# Altium PCB AHD PCB R2.4.PcbDoc (part 2 of 2)
Units mil, origin at the board's own origin, x right, y up, seen from the top; angles counter-clockwise.
Board outline 4500 x 2100 mil, 4 copper layers (Top Layer Signals, Ground Plane, Power Plane, Bottom Layer Signals); 162 components, 142 nets, 631 pads, 242 vias.
Unrouted connection lines stored in the file: 1.
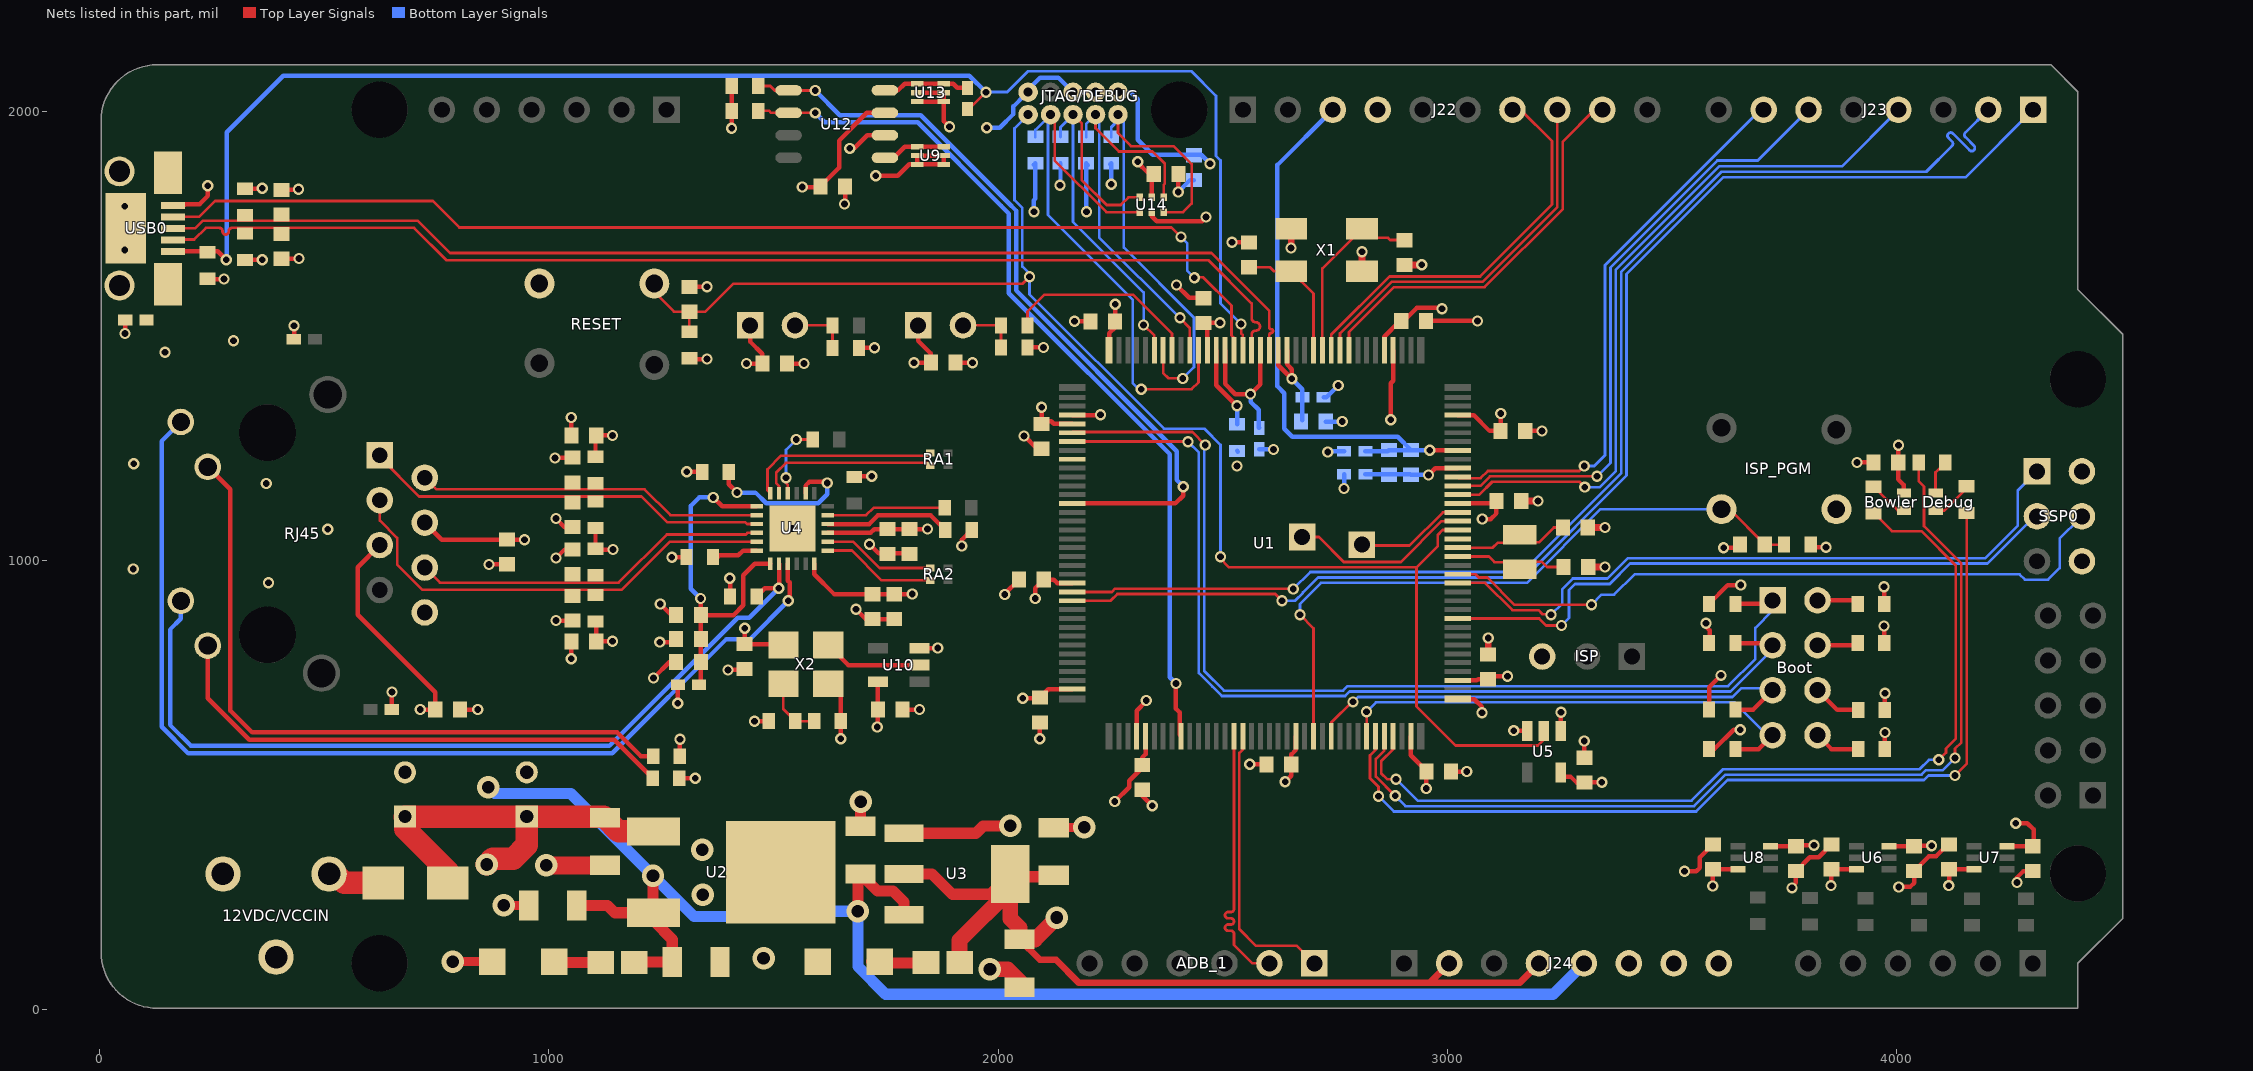
[diagram p4: the nets of this part, all layers, seen from the top]

## Via types
v1: diameter 25, hole 15, Top Layer Signals to Bottom Layer Signals, 226 vias
v2: diameter 50, hole 28, Top Layer Signals to Bottom Layer Signals, 15 vias
v3: diameter 25, hole 15, Top Layer Signals to Bottom Layer Signals, tented bottom, 1 vias

## Nets (pads, with @x,y where several pads share a name; then routed paths per layer and width w, separated by ;. In a path a pad name is that pad's centre, name@x,y a point inside that pad or via, vN(x,y) a via of type N, cw(c..) or ccw(c..) an arc to the next point about the centre after c; other vN are vias at no path point) (continued)
GND: 12VDC/VCCIN.2 12VDC/VCCIN.3 C1.1 C2.1 C3.1 C5.1 C6.1 C7.1 C8.1 C9.1 C10.1 C11.1 C12.1 C13.1 C19.1 C21.2 C22.2 C23.1 C24.1 C25.1 C26.1 C27.1 C28.1 C29.1 C30.1 C31.1 C34.1 C35.1 C36.2 C37.2 C38.2 C39.1 C40.2 C41.1 C42.2 C43.2 C44.2 C45.2 C48.1 C49.2 C52.2 C53.2 C54.1 C55.2 C56.2 C57.2 C58.1 C59.2 C60.2 C61.1 C63.2 C64.1 C65.1 C66.2 C67.2 C68.2 C69.2 C70.2 C71.2 C72.2 C73.2 D1.2 D2.2 FB3.1 FB5.1 FB6.2 FB8.1 FB9.1 ISP.3 ISP_PGM.4 J22.4 J24.6 J24.7 JTAG/DEBUG.3 JTAG/DEBUG.5 JTAG/DEBUG.9 R9.1 R10.1 R11.1 R15.1 R27.1 R28.1 R29.1 R30.1 R31.1 R35.1 R40.1 R41.1 R56.1 R57.1 R64.1 RESET.4 RJ45.8 SSP0.6 U1.4 U1.40 U1.76 U1.109 U2.2 U3.1 U4.25 U5.1 U5.3 U10.3 U12.6 U14.2 USB0.5 USB0.GND X1.2 X1.4 X2.2 | length 5226.7
  Top Layer Signals w6: R64.1@240,1626.47 R64.1@240.47,1626 ; FB8.1@432.38,1492 FB8.1@433,1492.62 ; v1(2521,1708) v1@2521.44,1707.56 ; C37.2@2604.44,543 C37.2@2607.44,546 ; C54.1@3644.44,1028 C54.1@3651.44,1035
  Top Layer Signals w10: v1(57,1505) 57.38,1505.38 FB5.1@57.38,1535 ; USB0.5@188.4,1790.18 191.22,1793 223,1793 241,1811 v1(241,1834) ; R64.1@240.47,1626 v1(277,1626) ; R40.1@324,1669.47 v1@361.53,1669.47 ; R41.1@324,1827.53 v1@361.53,1827.53 ; C63.2@405,1671.44 443.44,1671.44 v1(444,1672) ; C66.2@405,1824.56 441.56,1824.56 v1(443,1826) ; FB8.1@433,1492.62 v1(433,1522) ; FB9.1@650.62,668 651,668.38 v1(651,707) ; C28.1@802.56,668 v1(842,668) ; v1(867,991) 906.56,991 C29.1@907,991.44 ; C8.1@962.85,216.85 C8.1@962.85,232 ; v1(1014,1228) 1052.44,1228 C25.1@1053,1228.56 ; v1(1016,866) 1016.09,865.91 C26.1@1053,865.91 ; v1(1016,1005) 1035.03,1024.03 C27.1@1053,1024.03 ; v1(1016,1093) 1035.09,1073.91 C24.1@1053,1073.91 ; v1(1050,781) 1050,819.03 C31.1@1050.44,819.47 ; v1(1050,1318) 1050,1277.91 C30.1@1050.44,1277.47 ; v1(1233,738) 1269,774 C21.2@1283.44,774 ; v1(1247,818) 1276.44,818 C9.1@1283.44,825 ; v1(1248,903) 1273,878 C10.1@1283.44,878 ; v1(1274,1007) R27.1@1306.47,1007 ; R11.1@1291.53,564 1292,564.47 v1(1292,602) ; C1.1@1313,1608.56 1351.56,1608.56 v1(1352,1609) ; v1(1399,756) 1433.56,756 C2.1@1436,758.44 ; v1(1407,1962) 1407,1999.53 R9.1@1407.47,2000 R10.1@1407.47,2056 ; C65.1@1530.56,1438 v1(1568,1438) ; X2.2@1622,725 1649.53,697.47 R15.1@1649.53,642 1649.53,603.47 v1(1650,603) ; v1(1658,1793) 1659.56,1794.56 C59.2@1659.56,1832 ; v1(1670,1917) 1680,1917 1709,1946 U12.6@1748.28,1946 ; v1(1684,891) 1705.56,869.44 C12.1@1720.28,869.44 C23.1@1769,869.44 ; R56.1@1690.53,1473 v1(1725,1473) ; v1(1714,1036) 1734.56,1015.44 C22.2@1803,1015.44 ; C3.1@1787.56,668 v1(1825,668) ; U10.3@1825.26,804.4 1865.4,804.4 v1(1866,805) ; C64.1@1905.56,1440 v1(1943,1440) ; v1(2015,924) 2015,925.56 C40.2@2046.44,957 ; v1(2058,1277) 2086.56,1248.44 C43.2@2097,1248.44 ; R57.1@2066.53,1474 v1(2101,1474) ; v1(2093,603) C38.2@2093,639.44 ; U1.40@2164.87,1323.43 2227.43,1323.43 v1(2228,1324) ; v1(2170,1532) C41.1@2205.44,1532 ; v2@2191.15,405.15 v2(2192,406) ; U1.76@2308.57,608.87 2308.57,665.57 v1@2330,687 ; C44.2@2321,489.44 2321,476 v1(2343,454) ; U14.2@2341.97,1775.03 2341.97,1766.03 2353,1755 2454,1755 v1(2463,1764) ; v1(2397,1613) 2425.44,1584.56 C39.1@2467,1584.56 ; v1(2401,1820) 2401,1859.44 C58.1@2401.56,1860 ; v1@2521.44,1707.56 C49.2@2559,1707.56 ; v1(2560,546) C37.2@2597.44,546 ; X1.4@2810,1643.51 X1.4@2818.51,1643.51 ; v1(2874,1313) 2874,1394.23 2879.43,1399.67 U1.4@2879.43,1467.13 ; C57.2@2952.56,1533 v1(3067,1533) ; C55.2@3008.56,530 v1(3043,530) ; U1.109@3023.13,691.15 3059.85,691.15 3077,674 v1(3077,661) ; v1(3148,621) 3178.42,621 U5.3@3178.6,621.18 ; C36.2@3173.56,1288 v1(3211,1288) ; v1(3253,662) 3253,621.58 U5.1@3253.4,621.18 ; C60.2@3305,560.56 v1(3305,598) ; v1(3528,308) 3554.28,308 3562.28,316 3562.28,338.84 C71.2@3591,367.56 ; v1(3615,1028) C54.1@3644.44,1028 ; v1(3767,271) 3767,273 3776,282 C72.2@3776,308.44 3806.56,339 3826.44,339 C69.2@3855,367.56 ; v1(3912,1218) C61.1@3948.44,1218 ; v1(3972,854) 3972,816.53 R30.1@3972.53,816 R30.1@3972.53,803.47 ; v1(3972,941) 3972,903.53 R31.1@3972.53,903 ; R28.1@3972.53,581 R28.1@3973.53,580 3974,580.47 v1(3974,617) ; R29.1@3973.53,679.53 R29.1@3973.53,667 3974,667.47 v1(3974,704) ; v1(4005,273) 4030,273 4039,282 C70.2@4039,308.44 4072.06,341.5 4087.73,341.5 4113.79,367.56 C68.2@4117,367.56 ; v1(4268,283) 4268,294 4282.44,308.44 C67.2@4303,308.44
  Top Layer Signals w15: v1(2652,1695) 2652.52,1695.52 X1.2@2652.52,1738 ; X1.4@2810,1643.51 v1(2810,1687) ; C48.1@2905,1657.44 2942.44,1657.44 v1(2943,1658) ; C56.2@3091,790.56 v1(3091,827) ; C42.2@3164.56,1132 v1(3202,1132) ; C34.1@3312.56,1073 v1(3351,1073) ; C35.1@3313.56,985 v1(3351,985)
  Top Layer Signals w20: v2(786,107) D1.2@874.1,107 ; v2(900,232) C8.1@955.85,232 ; C13.1@2124,405.15 v2@2191.15,405.15
  Top Layer Signals w25: C6.1@1694,408.15 v2(1694,463) ; U3.1@1790.89,392.55 1950.55,392.55 1967,409 v2(2027,409)
  Top Layer Signals w35: v2(1982,90) 2021,90 2048,63 C7.1@2048,49
  Top Layer Signals w40: v2@994.15,320.85 C5.1@1125,320.85
  Bottom Layer Signals w6: v1(2770,1160) v1@2770.38,1160.38
  Bottom Layer Signals w10: v1(1975,1963) 2004,1963 2034.35,1993.35 2034.35,2010.35 2058.5,2034.5 2067,2026 JTAG/DEBUG.9@2067,2042 2067,2048 2093.65,2074.65 2134.35,2074.65 JTAG/DEBUG.5@2167,2042 JTAG/DEBUG.3@2217,2042 ; v1(2401,1820) 2427.44,1846.44 C73.2@2436,1846.44 ; R35.1@2532,1243.47 R35.1@2533.47,1242 ; FB6.2@2581,1247.38 2612.62,1247.38 v1(2613,1247) ; C45.2@2729.56,1309 v1(2766,1309) ; v1@2770.38,1160.38 FB3.1@2770.38,1192
  other v1: 2330,688 376,950 75,981 508,1069 1542,1071 371,1171 2532,1210 76,1215 146,1463 298,1489 362,1669 56,1691 56,1788 362,1828
  other v2: 1478,114 1343,256 994,321 1342,356
GPIO1_6_TXD: J23.2 U1.60 | length 2862
  Top Layer Signals w6: U1.60@2164.87,929.73 2253.26,929.73 2260.53,937 2656,937 v1(2657,936)
  Bottom Layer Signals w6: v1(2657,936) 2695,974 3167.38,974 3387,1193.62 3387,1641.97 3610.03,1865 4066,1865 4123.5,1922.5 ccw(c4118.59,1927.41) 4123.5,1932.31 4115.46,1940.35 cw(c4120.37,1945.25) 4115.46,1950.16 cw(c4120.37,1945.25) 4125.27,1950.16 4162.37,1913.06 ccw(c4167.28,1917.96) 4172.18,1913.06 ccw(c4167.28,1917.96) 4172.18,1922.87 4152.93,1942.12 cw(c4157.84,1947.03) 4152.93,1951.93 J23.2@4204,2003
GPIO1_7_RXD: J23.1 U1.61 | length 2867.7
  Top Layer Signals w6: U1.61@2164.87,910.05 2250.55,910.05 2265.5,925 2617,925 v1(2632,910)
  Bottom Layer Signals w6: v1(2632,910) v1(2632,910) 2661.45,910.05 2678.5,927.09 2678.5,928.5 2712,962 3172.35,962 3399,1188.65 3399,1637 3615,1853 4154,1853 J23.1@4304,2003
GPIO08_NET: Boot.1 R47.2 U1.42 | length 2318.5
  Top Layer Signals w6: U1.42@2164.87,1284.06 2166.3,1285.5 2432.5,1285.5 v1(2461,1257) ; Boot.1@3716,903 Boot.1@3724,911
  Top Layer Signals w10: R47.2@3641.53,903 Boot.1@3716,903
  Bottom Layer Signals w6: v1(2461,1257) 2459,1255 2459,754 2503,710 2767.62,710 2777.62,720 3625,720 3685.47,780.47 3685.47,849.53 3724,888.06 Boot.1@3724,911
GPIO09_NET: Boot.3 R46.2 U1.43 | length 2219.5
  Top Layer Signals w6: U1.43@2163.69,1263.2 U1.43@2164.87,1264.38 v1@2423,1264.38 ; Boot.3@3719,816 Boot.3@3724,811
  Top Layer Signals w10: R46.2@3641.53,816 Boot.3@3719,816
  Bottom Layer Signals w6: v1(2423,1264) 2447,1240 2447,749 2477,719 ; 2477.03,719 2498.03,698 2772.59,698 2782.59,708 3629.97,708 3724,802.03 Boot.3@3724,811
GPIO57_NET: Boot.5 R33.2 U1.98 | length 1145.7
  Top Layer Signals w6: U1.98@2741.64,608.87 2741.64,638.64 2788,685 v1(2790,685)
  Top Layer Signals w10: R33.2@3641.53,668 3681,668 Boot.5@3724,711
  Bottom Layer Signals w6: v1(2790,685) 2801,696 3634.94,696 3653.94,715 3720,715 Boot.5@3724,711
GPIO110_NET: Boot.7 R32.2 U1.102 | length 1092.5
  Top Layer Signals w6: v1(2820,663) 2820.38,662.62 U1.102@2820.38,608.87
  Top Layer Signals w10: R32.2@3641.53,580 3693,580 Boot.7@3724,611
  Bottom Layer Signals w6: v1(2820,663) 2841,684 3639,684 3712,611 Boot.7@3724,611
I2C1_SCL: ADB_1.2 U1.87 | length 616.3
  Top Layer Signals w6: U1.87@2525.1,608.87 2525.1,224.13 cw(c2518.17,224.13) 2518.17,217.19 2512.22,217.19 ccw(c2512.22,210.25) 2505.28,210.25 ccw(c2512.22,210.25) 2512.22,203.32 2518.17,203.31 cw(c2518.17,196.38) 2525.1,196.38 cw(c2518.17,196.38) 2518.17,189.44 2512.22,189.44 ccw(c2512.22,182.5) 2505.28,182.5 ccw(c2512.22,182.5) 2512.22,175.57 2518.17,175.57 cw(c2518.17,168.63) 2525.1,168.63 2525.1,143.9 2566,103 ADB_1.2@2604,103
I2C1_SDA: ADB_1.1 U1.88 | length 631.5
  Top Layer Signals w6: U1.88@2544.79,608.87 2544.79,578.79 2537.1,571.1 2537.1,178.9 2574,142 2665,142 ADB_1.1@2704,103
ISP_RESET: C54.2 ISP_PGM.3 R52.1 U1.96 | length 1505.4
  Top Layer Signals w6: v1(2672,879) 2702.27,848.73 U1.96@2702.27,608.87 U1.96@2703,608.13 ; ISP_PGM.3@3610.09,1113.83 3627.72,1113.83 C54.2@3706.56,1035 R52.1@3749.47,1035
  Bottom Layer Signals w6: v1(2672,879) 2672,903 2719,950 3177.32,950 3341.15,1113.83 ISP_PGM.3@3610.09,1113.83 ISP_PGM.3@3609.93,1114
LED1: RJ45.9 U4.3 | length 2340.4
  Top Layer Signals w10: U4.3@1532.16,992.26 1532.16,954.84 1536,951 1536,913 v1(1533,910)
  Bottom Layer Signals w10: RJ45.9@181.09,1308.02 138.56,1265.49 138.56,629.44 197,571 1141.63,571 1394.63,824 1447,824 v1(1533,910)
LED2: R26.2 RJ45.11 U4.2 | length 1921.7
  Top Layer Signals w10: R26.2@1462.53,920 1480.53,938 v1(1512,938) ; v1@1509,935 v1(1512,938) ; U4.2@1512.47,992.26 1512.47,938.47 v1(1512,938)
  Bottom Layer Signals w10: RJ45.11@181.09,909.98 181.09,870.09 157,846 157,633.63 203.63,587 1135,587 1420.5,872.5 1446.5,872.5 v1(1512,938)
LED_B: R13.2 U1.105 | length 2074.5
  Top Layer Signals w6: U1.105@2879.43,608.87 2879.43,579.43 2853,553 2853,526 2866,513 v1(2886,513) ; R13.2@3949.5,1104.97 3989.47,1065 4055.03,1065 4132,988.03 4132,603 4110,581 4110,572 v1(4094,556)
  Bottom Layer Signals w6: v1(2886,513) 2934,465 3543.91,465 3613.91,535 4050.97,535 4071.97,556 v1@4092,556
LED_G: R4.2 U1.103 | length 2070.2
  Top Layer Signals w6: U1.103@2840.06,608.87 2840.06,578.06 2828,566 2828,515.03 2847,496.03 v1(2847,475) ; v1(4130,521) 4156,547 R4.2@4156,1103.47
  Bottom Layer Signals w6: v1(2847,475) 2881,441 3553.85,441 3623.85,511 4060.91,511 4070.91,521 v1(4130,521)
LED_R: R3.1 U1.104 | length 2161.2
  Top Layer Signals w6: U1.104@2859.75,608.87 2859.75,576.72 2841,557.97 2841,519 v1(2884,476) ; R3.1@4049.47,1218 4049.47,1176 4061,1164.47 4061,1076 4144,993 4144,595 4130,581 v1(4130,560)
  Bottom Layer Signals w6: v1(2884,476) 2907,453 3548.88,453 3618.88,523 4055.94,523 4065.94,533 4103,533 v1(4130,560)
MISO: SSP0.1 U1.122 | length 1518.8
  Top Layer Signals w6: U1.122@3023.13,949.42 3023.72,950 3084,950 3145,889 3202.97,889 3211.97,880 3230,880 v1(3231,879)
  Bottom Layer Signals w6: v1(3231,879) 3256,904 3256,936 3279.5,959.5 3356.59,959.5 3402.09,1005 4197.58,1005 4269.47,1076.89 4269.47,1154.92 4308,1193.45 SSP0.1@4308,1203
Net12VDC/VCCIN_1: 12VDC/VCCIN.1 D10.1 | length 128.4
  Top Layer Signals w50: 12VDC/VCCIN.1@511,302 525,302 545,282 D10.1@631.15,282
NetBoot_2: Boot.2 R31.2 | length 92.8
  Top Layer Signals w6: R31.2@3905.47,911 R31.2@3913.47,903
  Top Layer Signals w10: Boot.2@3824,911 R31.2@3905.47,911
NetBoot_4: Boot.4 R30.2 | length 91.5
  Top Layer Signals w6: R30.2@3908.47,811 R30.2@3913.47,816
  Top Layer Signals w10: Boot.4@3824,811 R30.2@3908.47,811
NetBoot_6: Boot.6 R29.2 | length 108.7
  Top Layer Signals w10: Boot.6@3824,711 3868,667 R29.2@3914.47,667
NetBoot_8: Boot.8 R28.2 | length 103.3
  Top Layer Signals w10: Boot.8@3824,611 3855,580 R28.2@3914.47,580
"NetBowler Debug_2": "Bowler Debug.2" R3.2 | length 72.8
  Top Layer Signals w6: 4087,1150 4086.53,1150.47 4086.53,1196 4097.53,1207 R3.2@4108.53,1207
"NetBowler Debug_3": "Bowler Debug.3" R4.1 | length 92.5
  Top Layer Signals w6: 4087,1110.63 4106.1,1110.63 R4.1@4158,1162.53
"NetBowler Debug_4": "Bowler Debug.4" R13.1 | length 86.6
  Top Layer Signals w6: R13.1@3951,1162.53 4002.9,1110.63 4016.13,1110.63
NetC9_2: C9.2 C10.2 C21.1 FB1.2 U4.1 U4.19 | length 801.9
  Top Layer Signals w10: FB1.2@1334.62,723 1338.56,726.94 C21.1@1338.56,774 C9.2@1338.56,825 C10.2@1338.56,878 1338.56,914.44 v1(1338,915) ; C10.2@1350.56,878 1411,878 1433,900 1433,967 1458.26,992.26 U4.1@1492.79,992.26 ; v1(1366,1140) 1385.79,1120.21 U4.19@1463.26,1120.21
  Bottom Layer Signals w10: v1@1338.56,914.44 1316,937 1316,1121 1335,1140 v1(1366,1140)
NetD1_1: D1.1 R5.1 | length 101.7
  Top Layer Signals w25: D1.1@1013.9,105 R5.1@1115.6,105
NetD2_1: D2.1 R6.1 | length 107.9
  Top Layer Signals w20: D2.1@1715.9,107 D2.1@1736.9,107
  Top Layer Signals w25: D2.1@1736.9,107 1739.9,104 R6.1@1822.6,104
NetDBGEN_2: DBGEN.2 R55.2 R56.2 | length 133.5
  Top Layer Signals w6: DBGEN.2@1548,1523 R55.2@1631.47,1523 R56.2@1631.47,1473
NetFB5_2: FB5.2 USB0.6 USB0.7 USB0.8 USB0.9
NetFB13_1: FB13.1 U12.8 U13.3 U13.4 | length 193.8
  Top Layer Signals w10: U12.8@1748.28,2046 1777,2046 1792,2061 1900,2061 1909.38,2051.62 FB13.1@1932,2051.62
NetR7_1: R7.1 U4.11 | length 267.6
  Top Layer Signals w6: U4.11@1620.74,1100.53 1706.53,1100.53 1723,1117 R7.1@1881.47,1117
NetR11_2: R11.2 RJ45.10 | length 1546.7
  Top Layer Signals w10: RJ45.10@240.93,1208.02 291,1157.94 291,665.63 339.63,617 1152.1,617 1205.1,564 R11.2@1232.47,564
NetR12_2: R12.2 RJ45.12 | length 1181.2
  Top Layer Signals w6: RJ45.12@240.93,806.07 RJ45.12@240.93,809.98
  Top Layer Signals w10: RJ45.12@240.93,806.07 240.93,693.07 333,601 1145.47,601 R12.2@1231.47,515
NetR14_1: R14.1 R15.2 X2.1 | length 135.9
  Top Layer Signals w6: X2.1@1522,725 1522,668.53 R14.1@1548.53,642 R15.2@1590.47,642
NetR23_1: R23.1 U4.10 | length 282.9
  Top Layer Signals w10: U4.10@1620.74,1080.84 1713.31,1080.84 1732.47,1100 1850.47,1100 R23.1@1882.47,1068
NetR24_2: R24.2 U4.14 | length 367.5
  Top Layer Signals w10: R24.2@1400.53,1197 1400.53,1169.47 v1(1419,1151) ; U4.14@1571.53,1149.74 1571.53,1166.53 1579.52,1174.52 1617.48,1174.52 v1(1620,1172)
  Bottom Layer Signals w10: v1(1419,1151) 1460,1151 1484,1127 1600,1127 1620,1147 v1(1620,1172)
NetR27_2: R27.2 U4.24 | length 96.7
  Top Layer Signals w10: R27.2@1373.53,1005 1379.53,1011 1422,1011 1432.79,1021.79 U4.24@1463.26,1021.79
NetR36_1: R36.1 U4.16 | length 175.1
  Top Layer Signals w6: v1(1528,1184) 1528,1172 1532,1168 1532,1149.9 U4.16@1532.16,1149.74 ; v1(1551,1269) R36.1@1587.47,1269 1584.47,1263 R36.1@1585.47,1264
  Bottom Layer Signals w6: v1(1528,1184) 1528,1246 v1(1551,1269)
NetR57_2: R57.2 R58.2 TRST.2 | length 133.5
  Top Layer Signals w6: TRST.2@1922,1523 R58.2@2006.47,1523 R57.2@2006.47,1474
NetU9_3: U9.3 U9.4 U12.5 | length 141.5
  Top Layer Signals w10: U12.5@1768,1896 1792.68,1920.68 U9.4@1820.47,1920.68 U9.3@1879.53,1920.68
  Top Layer Signals w15: U12.5@1748.28,1896 U12.5@1768,1896
NetU10_2: U10.2 X2.3 | length 221.7
  Top Layer Signals w10: X2.3@1622,811.61 1666.61,767 U10.2@1825.26,767
PWM_0: J22.7 U1.11 | length 905.7
  Top Layer Signals w6: U1.11@2741.64,1467.13 2741.64,1502.52 2871.12,1632 3073.12,1632 3233,1791.88 3233,1933 3163,2003 J22.7@3144,2003
PWM_1: J22.8 U1.10 | length 855
  Top Layer Signals w6: U1.10@2761.32,1467.13 2761.32,1505.23 2876.09,1620 3078.09,1620 3245,1786.91 3245,2002 J22.8@3244,2003
PWM_2: J22.9 U1.9 | length 880.8
  Top Layer Signals w6: U1.9@2781.01,1467.13 2781.01,1507.95 2881.06,1608 3083.06,1608 3257,1781.94 3257,1932 J22.9@3328,2003
PWM_3: J23.7 U1.134 | length 1269.3
  Top Layer Signals w6: U1.134@3023.13,1185.64 3025.77,1183 3074.06,1183 3090.06,1199 3294,1199 v1(3305,1210)
  Bottom Layer Signals w6: v1(3305,1210) 3327,1210 3351,1234 3351,1656.88 3697.12,2003 J23.7@3704,2003
PWM_4: J23.6 U1.133 | length 1382.3
  Top Layer Signals w6: U1.133@3023.13,1165.95 3073.98,1165.95 3095.03,1187 v1(3333,1187)
  Bottom Layer Signals w6: v1(3333,1187) 3363,1217 3363,1651.91 3601.09,1890 3691,1890 J23.6@3804,2003
PWM_5: J23.4 U1.132 | length 1608.3
  Top Layer Signals w6: U1.132@3023.13,1146.27 3071.27,1146.27 3100,1175 3294,1175 v1(3306,1163)
  Bottom Layer Signals w6: v1(3306,1163) 3339.41,1163 3375,1198.59 3375,1646.94 3605.06,1877 3878,1877 J23.4@4004,2003
RA1_N: RA1.4 U4.17 | length 402.5
  Top Layer Signals w6: U4.17@1512.47,1149.74 1512.47,1165.53 1506,1172 1506,1195 1528,1217 1843.57,1217 RA1.4@1849.13,1211.44
RA1_P: RA1.2 U4.18 | length 432.5
  Top Layer Signals w6: U4.18@1492.79,1149.74 1487,1155.53 1487,1202.63 1517.37,1233 1843.13,1233 RA1.2@1849.13,1239
RA2_N: RA2.2 U4.8 | length 252.6
  Top Layer Signals w6: U4.8@1620.74,1041.47 1677.53,1041.47 1736,983 RA2.2@1849.13,983
RA2_P: RA2.4 U4.7 | length 255.9
  Top Layer Signals w6: U4.7@1620.74,1021.79 1674.59,1021.79 1740.93,955.44 RA2.4@1849.13,955.44
RESET: C1.2 JTAG/DEBUG.10 R1.1 RESET.3 U1.128 U5.2 | length 3442.5
  Top Layer Signals w6: RESET.3@1234.91,1617.16 1234.91,1597.09 1278.56,1553.44 C1.2@1313,1553.44 ; R1.1@1313,1508.53 C1.2@1313,1553.44 ; v1(2070,1631) 2055,1616 1411,1616 1348.44,1553.44 C1.2@1313,1553.44 ; v1@2493,1006 2514.53,984.47 2931.47,984.47 ; U1.128@3023.13,1067.53 2989.53,1067.53 2979,1057 2979,1032 2931.47,984.47 ; U5.2@3217,630.18 3217,603 3202,588 3018,588 2931.47,674.53 2931.47,984.47
  Bottom Layer Signals w6: 2036.7,1801.7 2036.7,1801.98 ; JTAG/DEBUG.10@2067,1992 2036.7,1961.7 2036.7,1801.98 ; v1(2495,1008) 2495,1257 2459,1293 2369,1293 2070,1592 v1(2070,1631) 2070,1638 2054,1654 2054,1784.68 2036.7,1801.98
RTC_ALARM: RTCALARM.1 U1.129 | length 407
  Top Layer Signals w6: RTCALARM.1@2677,1052 2714,1052 2769.53,996.47 2896.47,996.47 2987.21,1087.21 U1.129@3023.13,1087.21 U1.129@3023.35,1087.43
RTCX1: C35.2 U1.125 X3.1 | length 259.1
  Top Layer Signals w6: U1.125@3023.13,1008.47 3092.53,1008.47 3105,996 3145,996 X3.1@3161,980 3178,997 3210,997 3222,985 C35.2@3258.44,985
RTCX2: C34.2 U1.126 X3.2 | length 266.8
  Top Layer Signals w6: U1.126@3023.13,1028.16 3101.16,1028.16 3112,1039 3143.23,1039 X3.2@3161,1056.77 3177.77,1040 3204,1040 3237,1073 C34.2@3257.44,1073
RX_N: C27.2 R45.1 RJ45.6 U4.22 | length 803.6
  Top Layer Signals w6: RJ45.6@724,988.49 RJ45.6@724,984 757.69,950.31 1155.69,950.31 1262.84,1057.47 1438.47,1057.47 1442.16,1061.16 U4.22@1463.26,1061.16
RX_P: C26.2 R44.1 RJ45.3 U4.23 | length 1027.6
  Top Layer Signals w6: RJ45.3@624,1134 624,1088.49 662.53,1049.96 662.53,990.99 719.2,934.31 1162.31,934.31 1269.47,1041.47 U4.23@1463.26,1041.47
SCK: SSP0.3 U1.118 | length 1436.6
  Top Layer Signals w6: U1.118@3024.31,869.5 U1.118@3023.13,870.68 3204.32,870.68 3220,855 v1(3254,855)
  Bottom Layer Signals w6: v1(3254,855) 3271,872 3271,934.03 3284.47,947.5 3361.56,947.5 3407.06,993 4202.55,993 SSP0.3@4312.55,1103
SD_CLK: U1.45
SSP_MOSI: SSP0.4 U1.123 | length 1550.6
  Top Layer Signals w6: U1.123@3023.13,969.1 3062.87,969.1 3069.97,962 3088.97,962 3149.97,901 v1(3321,901)
  Bottom Layer Signals w6: v1(3321,901) 3343.5,923.5 3371.5,923.5 3417,969 4274,969 4286,957 4337,957 4363,983 4363,1048.45 4408,1093.45 SSP0.4@4408,1103
TCK_SWDCLK: JTAG/DEBUG.4 R62.2 U1.27 U14.4 | length 964.6
  Top Layer Signals w6: JTAG/DEBUG.4@2217,1992 2217,1962 2269,1910 2344,1910 2371.19,1882.81 2371.19,1838.56 2368.94,1836.3 U14.4@2368.94,1808 ; v1(2405,1540) 2405,1539 2426.68,1517.32 U1.27@2426.68,1467.13
  Bottom Layer Signals w6: R62.2@2196,1942.53 2196,1971 JTAG/DEBUG.4@2217,1992 2225,1984 2225,1719 2405,1539 v1(2405,1540)
TDI: JTAG/DEBUG.8 R60.2 U1.26 U14.1 | length 1309.7
  Top Layer Signals w6: JTAG/DEBUG.8@2117,1992 2126,1983 2126,1890 2240.97,1775.03 U14.1@2315,1775.03 U14.1@2315,1779.62 ; v1(2319,1381) 2431,1381 2446.36,1396.36 U1.26@2446.36,1467.13
  Bottom Layer Signals w6: R60.2@2083,1942.53 2083,1958 JTAG/DEBUG.8@2111,1986 ; JTAG/DEBUG.8@2117,1992 JTAG/DEBUG.8@2111,1986 ; v1(2319,1381) 2313,1381 2300,1394 2300,1580 2111,1769 JTAG/DEBUG.8@2111,1986
TDO_SWO: JTAG/DEBUG.6 R61.2 U1.31 U14.6 | length 973
  Top Layer Signals w6: JTAG/DEBUG.6@2167,1992 2186,1973 2186,1846.97 2241.97,1791 2273,1791 2290,1808 U14.6@2315,1808 ; v1(2324,1524) 2347.94,1500.06 U1.31@2347.94,1467.13
  Bottom Layer Signals w6: R61.2@2139,1942.53 2139,1964 JTAG/DEBUG.6@2167,1992 2167,1753 2324,1596 v1(2324,1524)
TMS_SWDIO: JTAG/DEBUG.2 R63.2 U1.30 U14.3 | length 1212
  Top Layer Signals w6: JTAG/DEBUG.2@2267,1992 2267,1951 2296,1922 2391,1922 2431,1882 2431,1794 2412.03,1775.03 U14.3@2368.94,1775.03 ; U1.30@2367.62,1467.13 2367.62,1417.38 2380,1405 v1(2411,1405)
  Bottom Layer Signals w6: R63.2@2252,1942.53 2252,1964 2267,1979 JTAG/DEBUG.2@2267,1992 ; JTAG/DEBUG.2@2269,1992 2280,1981 2280,1696 2436,1540 2436,1430 v1(2411,1405)
TRST: R58.1 U1.29 | length 441.6
  Top Layer Signals w6: R58.1@2065.53,1523 2065.53,1553.53 2103.5,1591.5 2300.5,1591.5 2387.31,1504.69 U1.29@2387.31,1467.13
TX_N: C25.2 R43.1 RJ45.2 U4.20 | length 773.8
  Top Layer Signals w6: RJ45.2@724,1184 750,1158 1213,1158 1270.47,1100.53 U4.20@1463.26,1100.53
TX_P: C24.2 R42.1 RJ45.1 U4.21 | length 905.3
  Top Layer Signals w6: RJ45.1@624,1234 624,1229.51 711.51,1142 1206.37,1142 1263.85,1084.53 1437.47,1084.53 1441.16,1080.84 U4.21@1463.26,1080.84
USB0__ID: U1.22 USB0.4 | length 2606.4
  Top Layer Signals w6: USB0.4@163.46,1764.57 221.57,1764.57 256.99,1800 383.37,1800 383.56,1799.81 426.44,1799.81 426.63,1800 742,1800 801,1741 2386,1741 v1(2407,1720) ; v1(2437,1629) 2438,1630 2456.75,1630 2519.5,1567.25 2519.5,1500.82 2525.1,1495.22 U1.22@2525.1,1467.13 U1.22@2525,1467.24
  Bottom Layer Signals w6: v1(2407,1720) 2421,1706 2421,1645 v1(2437,1629)
USB0__RREF: R35.2 U1.24 | length 184.5
  Top Layer Signals w6: U1.24@2485.73,1467.13 U1.24@2486,1466.87
  Top Layer Signals w10: U1.24@2485.73,1467.13 2485.73,1389.64 2531.37,1344 v1(2532,1344)
  Bottom Layer Signals w10: R35.2@2532,1302.53 v1(2532,1344)
USB0_N: C63.1 R40.2 U1.20 USB0.2 | length 2627
  Top Layer Signals w6: USB0.2@163.46,1713.39 164.07,1714 210.59,1714 236.59,1740 266.87,1740 cw(c266.87,1733.06) 273.81,1733.06 273.81,1732.22 ccw(c280.75,1732.22) 280.75,1725.29 ccw(c280.75,1732.22) 287.68,1732.22 287.68,1733.06 cw(c294.62,1733.06) 294.62,1740 700,1740 772,1668 2468,1668 2564.47,1571.53 2564.47,1539.13 ccw(c2573.72,1539.13) 2573.72,1529.88 cw(c2573.72,1520.63) 2573.72,1511.38 ccw(c2573.72,1502.13) 2564.47,1502.13 U1.20@2564.47,1467.13 U1.20@2566,1468.66
USB0_P: C66.1 R41.2 U1.18 USB0.3 | length 2627.8
  Top Layer Signals w6: USB0.3@163.46,1738.98 212.96,1739 229.96,1756 708,1756 780,1684 2474.63,1684 2603.84,1554.79 2603.84,1518.63 ccw(c2607.97,1518.63) 2607.97,1514.51 cw(c2607.97,1510.38) 2607.97,1506.26 ccw(c2607.97,1502.13) 2603.84,1502.13 U1.18@2603.84,1467.13
USB0_PPWR: R10.2 U1.50 U12.1 | length 1733.4
  Top Layer Signals w6: R10.2@1466.53,2056 1493,2056 1503,2046 U12.1@1533.72,2046 v1(1593,2046)
  Top Layer Signals w10: U1.50@2164.87,1126.58 2394.58,1126.58 2412,1144 v1(2412,1164)
  Bottom Layer Signals w10: v1(1593,2046) 1648,1991 1827.88,1991 2022.7,1796.18 2022.7,1795.9 2040,1778.61 2040,1601.2 2398,1243.2 2398,1179 v1@2414,1163
USB0_PWR_FAULT: R9.2 U1.81 U12.2 | length 1976.1
  Top Layer Signals w6: R9.2@1466.53,2000 1467.53,2001 1490,2001 1495,1996 U12.2@1533.72,1996 v1(1593,1996) ; U1.81@2406.5,609.36 U1.81@2406.99,608.87 U1.81@2408,609.87
  Top Layer Signals w10: v1(2396,726) 2396,670 2404,662 2404,611.86 U1.81@2406.5,609.36
  Bottom Layer Signals w10: v1(1593,1996) 1614.03,1974.97 1821.28,1974.97 2006.7,1789.55 2006.7,1789.28 2024,1771.98 2024,1594.57 2382,1236.57 2382,740 v1(2396,726)
USB0_VBUS: FB13.2 R64.2 U1.21 USB0.1 | length 3332.8
  Top Layer Signals w6: FB13.2@1933,2002.38 v1@1972.31,2041.69 ; v1(2541,1526) 2541,1505 2544.79,1501.21 U1.21@2544.79,1467.13 ; U1.21@2544,1467.92 U1.21@2544.79,1467.13 ; U1.21@2545,1467.35 U1.21@2544.79,1467.13
  Top Layer Signals w10: USB0.1@188.4,1687.82 263.18,1687.82 v1(282,1669)
  Bottom Layer Signals w6: v1@1984.5,2042.5 2020.5,2042.5 2066.65,2088.65 2430.35,2088.65 2485,2034 2485,1900.41 2495,1890.41 2495,1572 v1(2541,1526)
  Bottom Layer Signals w10: v1@283,1670 283,1953 409,2079 1936,2079 v1(1973,2042)
USB0_VDDA: C45.1 FB7.2 U1.16 U1.17 | length 245.1
  Top Layer Signals w10: U1.17@2623.53,1467.13 2623.53,1434.47 v1(2654,1404) 2654,1425.44 2643.21,1436.22 U1.16@2643.21,1467.13
  Bottom Layer Signals w10: v1(2654,1404) 2677.38,1380.62 FB7.2@2677.38,1363 C45.1@2677.38,1311.94
USB0_VSSA_REF: FB6.1 U1.19 U1.23 | length 318
  Top Layer Signals w10: U1.23@2505.42,1467.13 2505.42,1392.58 2528,1370 v1(2562,1370) 2584.16,1392.16 U1.19@2584.16,1467.13
  Bottom Layer Signals w10: v1@2562,1358 2562,1353 2580,1335 2580,1295.62 FB6.1@2581,1294.62
VBAT: U1.127
VCC_3.3V: "Bowler Debug.1" C2.2 C3.2 C7.2 C11.2 C12.2 C13.2 C22.1 C23.2 C28.2 C29.2 C30.2 C31.2 C36.1 C37.1 C38.1 C39.2 C40.1 C41.2 C42.1 C43.1 C44.1 C55.1 C56.1 C57.1 C58.2 C60.1 C61.2 C64.2 C65.2 C67.1 C68.1 C69.1 C70.1 C71.1 C72.1 C73.1 DBGEN.1 FB1.1 FB2.1 FB7.1 J24.2 J24.4 JTAG/DEBUG.1@2267,2042 R1.2 R6.2 R12.1 R14.2 R22.2 R23.2 R24.1 R26.1 R32.1 R33.1 R42.2 R43.2 R44.2 R45.2 R46.1 R47.1 R52.2 R60.1 R61.1 R62.1 R63.1 RJ45.4 RJ45.5 SSP0.2 TRST.1 U1.5 U1.25 U1.36 U1.41 U1.59 U1.71 U1.77 U1.94 U1.107 U1.111 U1.131 U1.141 U3.2 U3.4 U4.6 U4.9 U5.5 U6.3 U6.6 U7.3 U7.6 U8.3 U8.6 U10.5 U14.5 X2.4 | length 8057.7
  Top Layer Signals w10: RJ45.5@624,1034 575,985 575,879 747.44,706.56 C28.2@747.44,668 v1(714,668) ; RJ45.4@724,1084 762,1046 v1(946,1046) ; R44.2@1104,863.94 1106.09,861.86 1106.09,820 v1(1142,820) ; R42.2@1104,1071.94 R45.2@1104,1026 1106,1024 v1(1143,1024) ; R43.2@1104,1230.53 1104,1275.91 C30.2@1105.56,1277.47 1106.09,1278 v1(1142,1278) ; v1(1287,682) 1287.38,682.38 FB1.1@1287.38,723 ; R12.1@1290.53,515 v1(1326,515) ; v1(1307,1197) R24.1@1341.47,1197 ; R1.2@1313,1449.47 1314.47,1448 v1(1352,1448) ; v1(1403,960) 1403.47,959.53 R26.1@1403.47,920 ; v1(1436,849) C2.2@1436,813.56 1520.05,813.56 X2.4@1522,811.61 ; v1(1440,1438) C65.2@1475.44,1438 1475.44,1459.56 1448,1487 DBGEN.1@1448,1523 ; v1(1458,642) R14.2@1489.47,642 ; U4.6@1591.21,992.26 1591.21,968.79 1635,925 v1(1809,925) ; U4.9@1620.74,1061.16 1716.26,1061.16 1724.66,1069.56 v1(1843,1069.56) ; R22.2@1680,1185.53 1681.47,1187 v1(1719,1187) ; v1(1731,629) 1732.74,630.74 U10.5@1732.74,729.6 ; v1(1813,1440) C64.2@1850.44,1440 1850.44,1460.56 1822,1489 TRST.1@1822,1523 ; v1(1919,1032) 1919,1045.47 R23.2@1941.53,1068 ; U3.4@2027.11,302 U3.4@2039.11,302 ; v1(2055,693) 2091.44,693 C38.1@2093,694.56 2111.64,713.2 U1.71@2164.87,713.2 ; v1(2083,915) 2083,938.44 C40.1@2101.56,957 2124,957 2131.58,949.42 U1.59@2164.87,949.42 ; C43.1@2097,1303.56 v3(2097,1341) ; C43.1@2097,1309.56 2118.44,1309.56 2124.25,1303.75 U1.41@2164.87,1303.75 ; U1.36@2247.15,1467.13 2247.15,1505.15 2260.56,1518.56 C41.2@2260.56,1532 ; v1@2260.5,463.5 2292.28,495.28 2292.28,509.75 2321,538.46 C44.1@2321,544.56 2321,561 2328.25,568.25 U1.77@2328.25,608.87 ; C41.2@2261,1532.44 v1(2261,1570) ; v1@2309,1887 2336,1860 C58.2@2346.44,1860 2341.97,1855.53 U14.5@2341.97,1808 ; C39.2@2466,1533.44 2466,1467.18 U1.25@2466.05,1467.13 ; C39.2@2467,1529.44 2467.44,1529 v1(2494,1529) ; v1(2639,507) 2652.56,520.56 C37.1@2652.56,546 2653,546.44 2653,568 2662.9,577.9 U1.94@2662.9,608.87 ; C37.1@2663,545 C37.1@2663,546 ; U1.5@2859.75,1467.13 2859.75,1498.05 2894.7,1533 C57.1@2897.44,1533 2903.54,1533 2932.25,1561.72 v1@2976.28,1561.72 ; U1.107@2918.8,608.87 2918.8,566.2 2954.22,530.78 C55.1@2944.22,530.78 ; v1(2953,492) 2953.44,492.44 C55.1@2953.44,530 ; U1.131@3023.13,1126.58 3104.02,1126.58 C42.1@3109.44,1132 ; U1.141@3023.13,1323.43 3058.57,1323.43 3094,1288 C36.1@3118.44,1288 3119,1288.56 v1(3119,1327) ; U1.111@3023.46,732.56 U1.111@3023.13,732.88 3023.25,733 3066,733 3068.44,735.44 C56.1@3091,735.44 3097.56,742 v1(3134,742) ; v1(3078,1092) 3097,1092 3109.44,1104.44 C42.1@3109.44,1132 ; C42.1@3115.54,1132 C42.1@3109.44,1132 ; U5.5@3253.58,519 3253.4,518.82 3274.18,518.82 3287.56,505.44 C60.1@3305,505.44 3305.56,506 v1(3344,506) ; R33.1@3574,668 R33.1@3582.47,668 3582.47,717.47 v1(3609,744) ; v1(3576,860) 3576,852 3584,844 3584,817.53 R46.1@3582.47,816 ; R32.1@3582.47,580 3594.48,580 3637.48,623 v1(3652,623) ; R47.1@3582.47,903 3624.47,945 v1(3653,945) ; v1(3591,275) C71.1@3591,312.44 U8.3@3646.55,312.44 ; U8.6@3719.42,363.59 C72.1@3776,363.56 3778.44,366 v1(3816,366) ; R52.2@3808.53,1029.47 R52.2@3808.53,1035 3814.53,1029 v1(3843,1029) ; v1(3854,276) 3855,277 C69.1@3855,312.44 U6.3@3910.58,312.41 ; U6.6@3983.42,363.59 C70.1@4039,363.56 4040.44,365 v1(4078,365) ; v1(4004,1256) 4004,1180 4016.13,1167.87 4016.13,1150 ; v1(4116,276) 4117,277 C68.1@4117,312.44 ; C68.1@4117,312.44 U7.3@4172.58,312.41 ; U7.6@4245.42,363.59 C67.1@4303,363.56 ; v1(4265,415) 4291,415 4305,401 C67.1@4305,361
  Top Layer Signals w15: C7.2@2048,156.15 2093.15,111 2129,111 2180.38,59.62 2960.62,59.62 ; J24.2@3004,103 2960.62,59.62 ; J24.4@3204,103 3160.62,59.62 2960.62,59.62 ; R47.1@3581,903 R47.1@3582.47,903
  Top Layer Signals w20: J24.2@2996,103 J24.2@3004,103 J24.2@3004,94.47
  Top Layer Signals w25: U3.2@1790.89,302 1853,302 1898.4,256.6 1981.71,256.6 U3.4@2027.11,302 2033.11,296 C13.2@2125,296
  Top Layer Signals w35: R6.2@1914.4,105 1914.4,154.4 U3.4@2027,267 ; U3.4@2027,296 U3.4@2027,267 ; U3.4@2038,267.11 2031.11,274 U3.4@2027.11,302 2027.11,267.11 U3.4@2027,267 ; v2(2131,205) 2082.15,156.15 C7.2@2048,156.15 2048,182 2027,203 U3.4@2027,267
  Bottom Layer Signals w10: v1(2080,1776) 2080,1802 2083,1805 R60.1@2083,1883.47 R60.1@2080,1880.47 ; R61.1@2137,1881.47 R61.1@2139,1883.47 2139,1836 v1(2138,1835) ; v1(2197,1776) 2196,1777 R62.1@2196,1883.47 R62.1@2200,1879.47 ; R63.1@2250,1881.47 R63.1@2252,1883.47 v1(2252,1837) ; JTAG/DEBUG.1@2267,2042 2295,2042 2311,2026 2311,1936 2344,1903 2452,1903 v1(2472,1883) ; FB7.1@2725,1363.38 FB7.1@2724.62,1363 2731,1363 v1(2757,1389) ; v1(2734,1241) 2736,1243 FB2.1@2770.38,1243
  other v1: 2260,463 2988,1560 2311,1887
VCC_5V: C6.2 C8.2 C19.2 C59.1 J24.5 R5.2 U2.3 U3.3 U9.1 U9.2 U9.5 U9.6 U12.7 U13.1 U13.2 U13.5 U13.6 | length 4206.5
  Top Layer Signals w10: v1(1564,1831) 1603.44,1831 C59.1@1604.44,1832 1646,1873.56 1646,1934 1708,1996 U12.7@1748.28,1996 ; v1(1728,1856) 1777,1856 1802.31,1881.31 U9.6@1820.47,1881.31 ; U13.6@1820.47,2021.31 U13.1@1879.53,2021.31 ; U13.5@1820.47,2041 U13.2@1879.53,2041 U13.1@1879.53,2021.31 ; v1(1892,1965) 1879.53,1977.47 U13.1@1879.53,2021.31 ; U9.6@1820.47,1881.31 U9.1@1879.53,1881.31 U9.2@1879.53,1901 U9.5@1820.47,1901 U9.6@1820.47,1881.31
  Top Layer Signals w20: J24.5@3303,99 J24.5@3303,109
  Top Layer Signals w25: C8.2@1062.15,232 1131,232 1147.55,215.45 U2.3@1233,215.45 ; R5.2@1190.4,105 1191.4,106 C19.2@1274.85,106 1274.85,156.15 1233,198 U2.3@1233,215.45 ; v2(1232,298) 1232,216.45 U2.3@1233,215.45 ; v2(1688,219) 1688,295.85 C6.2@1694,301.85 1732.04,263.81 1766.19,263.81 1790.89,239.11 U3.3@1790.89,211.45
  Bottom Layer Signals w25: v2(865,495) 879,481 1049,481 v2(1232,298) 1323,207 1606,207 1618,219 v2(1688,219) 1688,96 1750,34 3235,34 J24.5@3304,103
VCC_IN: C5.2 C52.1 C53.1 D10.2 J24.8 U2.1 | length 925.4
  Top Layer Signals w50: C52.1@679,428.79 C52.1@680,428.79 ; D10.2@774.85,282 774.85,308.15 680,403 C52.1@680,428.79 ; v2(862,323) 875,336 921,336 951,366 C53.1@951,429.79 ; U2.1@1233,396.55 1155.6,396.55 C5.2@1125,427.15 1122.36,429.79 C53.1@951,429.79 ; C52.1@680,428.79 C52.1@680,429.79 C53.1@951,429.79
VDDA: C46.1 C47.1 FB2.2 J22.3 U1.137 | length 1275.5
  Top Layer Signals w10: v1@2961.31,1244.69 U1.137@3023.13,1244.69
  Bottom Layer Signals w10: J22.3@2745,2003 2622,1880 2622,1387.17 2637,1372.17 2637,1292.69 2654.69,1275 2889.56,1275 C46.1@2919,1245.56 ; FB2.2@2817.62,1243 2867.44,1243 C47.1@2870,1245.56 C46.1@2919,1245.56 ; v1(2961,1245) 2960.44,1245.56 C46.1@2919,1245.56
VSSA: C46.2 C47.2 FB3.2 U1.135 | length 212.7
  Top Layer Signals w10: v1(2958,1190) 2973.32,1205.32 U1.135@3023.13,1205.32
  Bottom Layer Signals w10: FB3.2@2817.62,1192 2917.44,1192 C46.2@2919,1190.44 2919.44,1190 v1(2958,1190)
WAKEUP0: U1.130 WAKEUP0.1 | length 252.5
  Top Layer Signals w6: WAKEUP0.1@2807,1019 2821,1033 2916.03,1033 2989.93,1106.9 U1.130@3023.13,1106.9
XTAL1: C48.2 U1.12 X1.1 | length 423.6
  Top Layer Signals w6: U1.12@2721.95,1467.13 2721.95,1649.95 X1.1@2810,1738 ; X1.1@2817.56,1745.56 X1.1@2810,1738 ; C48.2@2905,1712.56 2904.56,1713 2873,1713 2868,1718 2830,1718 X1.1@2810,1738
XTAL2: C49.1 U1.13 X1.3 | length 294.2
  Top Layer Signals w6: C49.1@2559,1652.44 2605.56,1652.44 2614.49,1643.51 X1.3@2652.52,1643.51 2702.27,1593.76 U1.13@2702.27,1467.13
pads on no net: ISP_PGM.1 ISP_PGM.2 J24.1 JTAG/DEBUG.1@2342.59,2073.5 JTAG/DEBUG.7 RESET.1 RESET.2 RJ45. RJ45.7 U1.14 U1.15 U1.33 U1.35 U1.37 U1.39 U1.44 U1.53 U1.54 U1.55 U1.56 U1.57 U1.58 U1.63 U1.65 U1.69 U1.72 U1.89 U1.90 U1.91 U1.106 U1.110 U1.112 U1.113 U1.114 U1.115 U1.116 U1.117 U1.119 U1.120 U1.121 U1.140 U4.4 U10.1 U12.3 U12.4

## Polygon pours and split planes (outlines as drawn)
GND on Top Layer Signals "Power Plane-No Net" (solid, remove dead copper, pour order 14): 2501,1816 2501,1588 2964,1588 2964,1816
GND on Top Layer Signals "Power Plane-No Net" (solid, remove dead copper, pour order 12): 1242.79,864 1206,827 1206,639 1259.69,585 1836,585 1892,641 1892,795 1855.22,832 1689.19,832 1657.37,864
NetFB5_2 on Top Layer Signals "Power Plane-No Net" (solid, remove dead copper, pour order 11): 4,1569.38 57.54,1569.38 57.54,1514 211,1514 211,1969 4,1969
GND on Top Layer Signals "Power Plane-No Net" (solid, remove dead copper, pour order 9): 23,541 822,542 822,904 773.88,904 752.83,925 667.61,925 635.53,893 582.4,893 582.4,1518 25,1518 23,1516
GND on Top Layer Signals "Power Plane-No Net" (solid, remove dead copper, pour order 8): 1340,54 1340,146 1323,166 1323,455 1652,455 1652,54
GND on Top Layer Signals "Power Plane-No Net" (solid, remove dead copper, pour order 13): 3382,1167 3073,1167 3073,868 3382,868
GND on Bottom Layer Signals "Power Plane-No Net" (solid, remove dead copper, pour order 10): 1729,832 1729,1206 1705,1230 1443,1230 1415,1202 1415,864 1243,864 1206,827 1206,639 1260,585 1836,585 1892,641 1892,790 1856,832
GND on Ground Plane (split plane): 4338.9,1967.1 4269.1,1967.1 4269.1,2038.9 4338.9,2038.9
GND on Ground Plane (split plane): 4337.9,67.1 4268.1,67.1 4268.1,138.9 4337.9,138.9
GND on Ground Plane (split plane): 2938.9,67.1 2869.1,67.1 2869.1,138.9 2938.9,138.9
GND on Ground Plane (split plane): 2738.9,67.1 2669.1,67.1 2669.1,138.9 2738.9,138.9
GND on Ground Plane (split plane): 2579.9,1967.1 2510.1,1967.1 2510.1,2038.9 2579.9,2038.9
GND on Ground Plane (split plane): 513.64,1416.88 518.96,1415.98 524.15,1414.48 529.14,1412.41 533.87,1409.8 538.27,1406.68 542.29,1403.08 545.89,1399.06 549.02,1394.65 551.63,1389.93 553.69,1384.94 555.19,1379.75 556.09,1374.43 556.39,1369.04 556.09,1363.65 555.19,1358.33 553.69,1353.14 551.63,1348.15 549.02,1343.43 545.89,1339.02 542.29,1335 538.27,1331.4 533.87,1328.28 529.14,1325.66 524.15,1323.6 518.96,1322.1 513.64,1321.2 508.25,1320.9 502.86,1321.2 497.54,1322.1 492.35,1323.6 487.36,1325.66 482.64,1328.28 478.24,1331.4 474.21,1335 470.61,1339.02 467.49,1343.43 464.88,1348.15 462.81,1353.14 461.32,1358.33 460.41,1363.65 460.11,1369.04 460.41,1374.43 461.32,1379.75 462.81,1384.94 464.88,1389.93 467.49,1394.65 470.61,1399.06 474.21,1403.08 478.24,1406.68 482.64,1409.8 487.36,1412.41 492.35,1414.48 497.54,1415.98 502.86,1416.88 508.25,1417.18
GND on Ground Plane (split plane): 128.45,2083.01 4335.13,2083.01 4383.35,2034.78 4383.35,1603.1 4383.74,1599.18 4384.88,1595.41 4386.74,1591.94 4389.24,1588.89 4483.35,1494.78 4483.35,211.43 4389.24,117.31 4386.74,114.27 4384.88,110.79 4383.74,107.02 4383.35,103.1 4383.35,23.2 128.45,23.2 127.77,23.13 119.3,23.5 110.22,24.7 101.27,26.68 92.54,29.43 84.08,32.94 75.95,37.17 68.23,42.09 60.96,47.67 54.2,53.86 48.02,60.61 42.44,67.88 37.52,75.6 33.29,83.73 29.78,92.19 27.03,100.93 25.05,109.87 23.85,118.95 23.48,127.42 23.55,128.1 23.55,1978.1 23.48,1978.78 23.85,1987.25 25.05,1996.33 27.03,2005.28 29.78,2014.01 33.29,2022.48 37.52,2030.6 42.44,2038.33 48.02,2045.59 54.2,2052.35 60.96,2058.54 68.23,2064.11 75.95,2069.03 84.08,2073.26 92.54,2076.77 101.27,2079.52 110.22,2081.51 119.3,2082.7 127.77,2083.07
GND on Ground Plane (split plane): 499.47,796.8 504.79,795.9 509.98,794.4 514.97,792.34 519.69,789.72 524.1,786.6 528.12,783 531.72,778.98 534.84,774.57 537.45,769.85 539.52,764.86 541.01,759.67 541.92,754.35 542.22,748.96 541.92,743.57 541.01,738.25 539.52,733.06 537.45,728.07 534.84,723.35 531.72,718.94 528.12,714.92 524.1,711.32 519.69,708.2 514.97,705.59 509.98,703.52 504.79,702.02 499.47,701.12 494.08,700.82 488.69,701.12 483.37,702.02 478.18,703.52 473.19,705.59 468.47,708.2 464.06,711.32 460.04,714.92 456.44,718.94 453.32,723.35 450.7,728.07 448.64,733.06 447.14,738.25 446.24,743.57 445.94,748.96 446.24,754.35 447.14,759.67 448.64,764.86 450.7,769.85 453.32,774.57 456.44,778.98 460.04,783 464.06,786.6 468.47,789.72 473.19,792.34 478.18,794.4 483.37,795.9 488.69,796.8 494.08,797.1
no net on Power Plane (split plane): 4338.9,1967.1 4269.1,1967.1 4269.1,2038.9 4338.9,2038.9
no net on Power Plane (split plane): 4337.9,67.1 4268.1,67.1 4268.1,138.9 4337.9,138.9
no net on Power Plane (split plane): 2579.9,1967.1 2510.1,1967.1 2510.1,2038.9 2579.9,2038.9
no net on Power Plane (split plane): 2938.9,67.1 2869.1,67.1 2869.1,138.9 2938.9,138.9
no net on Power Plane (split plane): 2738.9,67.1 2669.1,67.1 2669.1,138.9 2738.9,138.9
VCC_5V on Power Plane (split plane): 128.45,2083.01 1948.9,2083.01 1948.9,1883.11 1846.89,1781.1 1542.11,1781.1 1436.6,1886.6 1434.95,1887.71 1433,1888.1 200,1888.1 198.05,1887.71 196.4,1886.6 113.4,1803.6 112.29,1801.95 111.9,1800 111.9,618 112.29,616.05 113.4,614.4 177.4,550.4 179.05,549.29 181,548.9 989.89,548.9 1184.9,353.89 1184.9,200 1184.9,189 1185.29,187.05 1186.4,185.4 1232.69,139.1 1131.11,139.1 836.6,433.6 834.95,434.71 833,435.1 23.55,435.1 23.55,1978.1 23.48,1978.78 23.85,1987.25 25.05,1996.33 27.03,2005.28 29.78,2014.01 33.29,2022.48 37.52,2030.6 42.44,2038.33 48.02,2045.59 54.2,2052.35 60.96,2058.54 68.23,2064.11 75.95,2069.03 84.08,2073.26 92.54,2076.77 101.27,2079.52 110.22,2081.51 119.3,2082.7 127.77,2083.07
no net on Power Plane (split plane): 515.92,352.42 521.53,351.47 527,349.89 532.26,347.71 537.24,344.96 541.88,341.67 546.12,337.88 549.91,333.63 553.2,328.99 555.96,324.01 558.13,318.76 559.71,313.29 560.66,307.68 560.98,302 560.66,296.32 559.71,290.71 558.13,285.24 555.96,279.99 553.2,275.01 549.91,270.37 546.12,266.12 541.88,262.33 537.24,259.04 532.26,256.29 527,254.11 521.53,252.53 515.92,251.58 510.24,251.26 504.56,251.58 498.95,252.53 493.49,254.11 488.23,256.29 483.25,259.04 478.61,262.33 474.37,266.12 470.57,270.37 467.28,275.01 464.53,279.99 462.35,285.24 460.78,290.71 459.82,296.32 459.51,302 459.82,307.68 460.78,313.29 462.35,318.76 464.53,324.01 467.28,328.99 470.57,333.63 474.37,337.88 478.61,341.67 483.25,344.96 488.23,347.71 493.49,349.89 498.95,351.47 504.56,352.42 510.24,352.74
VCC_3.3V on Power Plane (split plane): 4383.35,2034.78 4383.35,1603.1 4383.74,1599.18 4384.88,1595.41 4386.74,1591.94 4389.24,1588.89 4483.35,1494.78 4483.35,211.43 4389.24,117.31 4386.74,114.27 4384.88,110.79 4383.74,107.02 4383.35,103.1 4383.35,23.2 3672.1,23.2 3672.1,120 3671.71,121.95 3670.6,123.6 3615.6,178.6 3613.95,179.71 3612,180.1 2190,180.1 2188.05,179.71 2186.4,178.6 2146.89,139.1 1247.11,139.1 1195.1,191.11 1195.1,200 1195.1,356 1194.71,357.95 1193.6,359.6 995.6,557.6 993.95,558.71 992,559.1 183.11,559.1 122.1,620.11 122.1,1797.89 202.11,1877.9 1430.89,1877.9 1536.4,1772.4 1538.05,1771.29 1540,1770.9 1849,1770.9 1850.95,1771.29 1852.6,1772.4 1957.6,1877.4 1958.71,1879.05 1959.1,1881 1959.1,2083.01 4335.13,2083.01
VCC_IN on Power Plane (split plane): 1125.4,130.4 1127.05,129.29 1129,128.9 2149,128.9 2150.95,129.29 2152.6,130.4 2192.11,169.9 3609.89,169.9 3661.9,117.89 3661.9,23.2 128.45,23.2 127.77,23.13 119.3,23.5 110.22,24.7 101.27,26.68 92.54,29.43 84.08,32.94 75.95,37.17 68.23,42.09 60.96,47.67 54.2,53.86 48.02,60.61 42.44,67.88 37.52,75.6 33.29,83.73 29.78,92.19 27.03,100.93 25.05,109.87 23.85,118.95 23.48,127.42 23.55,128.1 23.55,424.9 830.89,424.9

## Other copper
Power Plane (plane layer: these items are gaps in the copper):
  circle w10: c510.24,302 r55.76
  lines w10: -9,430 833,430 1129,134 2014,134 2149,134 2190,175 3612,175 3667,120 3667,21 ; 343,1298 392,1298 ; 1190,200 1190,189 ; 1245,134 1190,189 ; 1954,2103.1 1954,1881 1849,1776 1540,1776 1433,1883 200,1883 117,1800 117,618 181,554 448,554 767,554 992,554 1190,356 1190,189 ; 3647,17 3655,9 ; 2505,1962 2505,2044 2585,2044 2585,1962 2505,1962 ; 2664,62 2664,144 2744,144 2744,62 2664,62 ; 2864,62 2944,62 2944,144 2864,144 2864,62 ; 4263,62 4263,144 4343,144 4343,62 4263,62 ; 4264,1962 4344,1962 4344,2044 4264,2044 4264,1962
Ground Plane (plane layer: these items are gaps in the copper):
  circle w10: c508.25,1369.04 r53.17
  circle w10: c494.08,748.96 r53.17
  lines w10: 2505,1962 2585,1962 2585,2044 2505,2044 2505,1962 ; 2664,62 2664,144 2744,144 2744,62 2664,62 ; 2864,62 2944,62 2944,144 2864,144 2864,62 ; 4263,62 4343,62 4343,144 4263,144 4263,62 ; 4264,1962 4264,2044 4344,2044 4344,1962 4264,1962

## Silkscreen, mask and mechanical layers (free items; w line width, h text height)
Top Overlay:
  lines w5.5: 1367,755 1367,791 ; 1784,1100 1820,1100
  lines w10: -28,1381 834,1381 834,740 833,739 -26,739
  text "Digital IO Lower Byte" at 3551,2068 h45
  text "Digital IO Higher Byte" at 2493,2067 h45
  text "U" at 282,2050 h250 r180
  text "4" at 3917,1918 h65 r90
  text "8" at 3463,1916 h65 r90
  text "2" at 4119,1916 h65 r90
  text "7" at 3620,1915 h65 r90
  text "12" at 3057,1887 h60 r90
  text "TX1" at 4220,1848 h65 r90
  text "RX1" at 4324,1845 h65 r90
  text "IO16" at 775,1834 h65 r90
  text "IO17" at 884,1834 h65 r90
  text "GND" at 2861,1832 h65 r90
  text "IO19" at 1080,1831 h65 r90
  text "IO21" at 1284,1831 h65 r90
  text "IO18" at 989,1830 h65 r90
  text "IO20" at 1182,1830 h65 r90
  text "SCL0" at 2559,1813 h65 r90
  text "AVCC" at 2759,1807 h65 r90
  text "SDA0" at 2657,1805 h65 r90
  text "PWM1" at 3821,1789 h65 r90
  text "PWM0" at 4020,1785 h65 r90
  text "PWM4" at 3267,1784 h65 r90
  text "PWM2" at 3724,1784 h65 r90
  text "PWM6" at 2961,1783 h65 r90
  text "PWM5" at 3161,1783 h65 r90
  text "PWM3" at 3361,1783 h65 r90
  text "USB Data Lines" at 1493,1715 h65
  text "Marlin" at 3398,1605 h250
  text "0.2b" at 3907,1600 h100
  text "b" at 478,1549 h200
  text "Designed By" at 3407,1542 h70
  text "Adam J. Vadala-Roth" at 3405,1488 h70
  text "d" at 3402,1406 h150
  text "a" at 3916,1325 h400
  text "Ethernet PHY" at 1484,1313 h65
  text "15/14" at 4152,864 h60
  text "13/12" at 4153,759 h60
  text "E" at 43,714 h45 r270
  text "GND     RX      TX" at 3169,700 h45
  text "11/10" at 4149,658 h60
  text "9/8" at 4205,562 h60
  text "7/6" at 4209,473 h60
  text "3.3v Regulator" at 1824,454 h45
  text "5.0v Regulator" at 1328,450 h45
  text "Analog Input Section" at 3626,450 h65
  text "Reset Buffer" at 3128,440 h65
  text "5.0v" at 3313,174 h65 r90
  text "IOREF" at 3020,172 h65 r90
  text "VIN" at 3613,172 h65 r90
  text "RESET" at 3118,171 h65 r90
  text "ADIO2" at 2521,169 h65 r90
  text "ADIO4" at 2321,168 h65 r90
  text "SCL1/RX3" at 2622,168 h65 r90
  text "3.3v" at 3219,168 h65 r90
  text "ADIO5" at 2218,167 h65 r90
  text "ADIO3" at 2422,167 h65 r90
  text "SDA/TX3" at 2723,167 h60 r90
  text "GND" at 3506,167 h65 r90
  text "GND" at 3417,166 h65 r90
  text "A1" at 3904,163 h60 r90
  text "A2" at 4023,163 h60 r90
  text "A3" at 4142,163 h60 r90
  text "A4" at 4262,163 h60 r90
  text "A0" at 3780,162 h60 r90
  text "A5" at 4317,161 h60
  text "5.0v Power Indicator" at 741,23 h45
  text "3.3v Power Indicator" at 1460,19 h45
  text "Power & Reset" at 2855,18 h45
  text "Analog Input" at 3755,18 h45
  text "Additional IO 1" at 2155,15 h45
Bottom Overlay:
  region: 3068 vertices and 0 holes, not listed, extent 1012.63,580.91 2178.45,1632.33
  text "AVCC" at 2759,1948 h65 r90
  text "4" at 3918,1948 h65 r90
  text "GND" at 2862,1947 h65 r90
  text "SDA0" at 2657,1946 h65 r90
  text "12" at 3059,1945 h65 r90
  text "8" at 3464,1945 h65 r90
  text "PWM0" at 4021,1944 h65 r90
  text "7" at 3620,1942 h65 r90
  text "2" at 4120,1942 h65 r90
  text "ADIO19" at 1079,1941 h65 r90
  text "ADIO17" at 880,1940 h65 r90
  text "ADIO18" at 978,1940 h65 r90
  text "ADIO20" at 1178,1940 h65 r90
  text "ADIO21" at 1280,1940 h65 r90
  text "SCL0" at 2560,1940 h65 r90
  text "PWM4" at 3263,1940 h65 r90
  text "ADIO16" at 777,1939 h65 r90
  text "PWM2" at 3725,1939 h65 r90
  text "PWM1" at 3821,1939 h65 r90
  text "PWM6" at 2963,1938 h65 r90
  text "PWM5" at 3160,1938 h65 r90
  text "PWM_3" at 3360,1937 h65 r90
  text "RX1" at 4323,1937 h65 r90
  text "TX1" at 4219,1936 h65 r90
  text "USB Power" at 2329,1170 h60 r90
  text "Additional IO" at 3506,491 h60
  text "Designed By" at 1942,452 h60
  text "SCL1/RX3" at 2621,416 h65 r90
  text "Adam J. Vadala-Roth" at 1941,403 h60
  text "SDA/TX3" at 2724,380 h65 r90
  text "Released under" at 1939,324 h60
  text "Reset" at 3116,322 h65 r90
  text "IOREF" at 3020,320 h65 r90
  text "ADIO4" at 2320,315 h65 r90
  text "ADIO2" at 2520,315 h65 r90
  text "ADIO5" at 2216,314 h65 r90
  text "ADIO3" at 2421,314 h65 r90
  text "3.3v" at 3218,278 h65 r90
  text "5.0v" at 3311,278 h65 r90
  text "GND" at 3507,270 h65 r90
  text "GND" at 3417,269 h65 r90
  text "VIN" at 3614,260 h65 r90
  text "A0" at 3823,228 h65 r90
  text "A4" at 4217,227 h65 r90
  text "A1" at 3920,225 h65 r90
  text "A2" at 4021,225 h65 r90
  text "A5" at 4327,225 h65 r90
  text "A3" at 4122,222 h65 r90
  text "d" at 1943,219 h200
  text "Powered By The" at 1938,134 h60
  text "Bowler Communication System" at 1938,90 h60
  text "http://www.bowler.io" at 1938,47 h60
Mechanical 15:
  circle w5: c623.45,103.1 r62.5
  circle w5: c623.45,2003.1 r62.5
  circle w5: c2403.45,2003.1 r62.5
  circle w5: c4403.45,303.1 r62.5
  circle w5: c4403.45,1403.1 r62.5
Mechanical 16:
  drawing of 372 lines, arcs and shapes, not listed

## Text inside footprints (layer, text, board x,y; h text height)
C52: Top Overlay "+" at 594,361 h35 r90
C53: Top Overlay "+" at 864,360 h35 r90